# EAGLE board uzed-carrier (EAGLE 8.3.1)
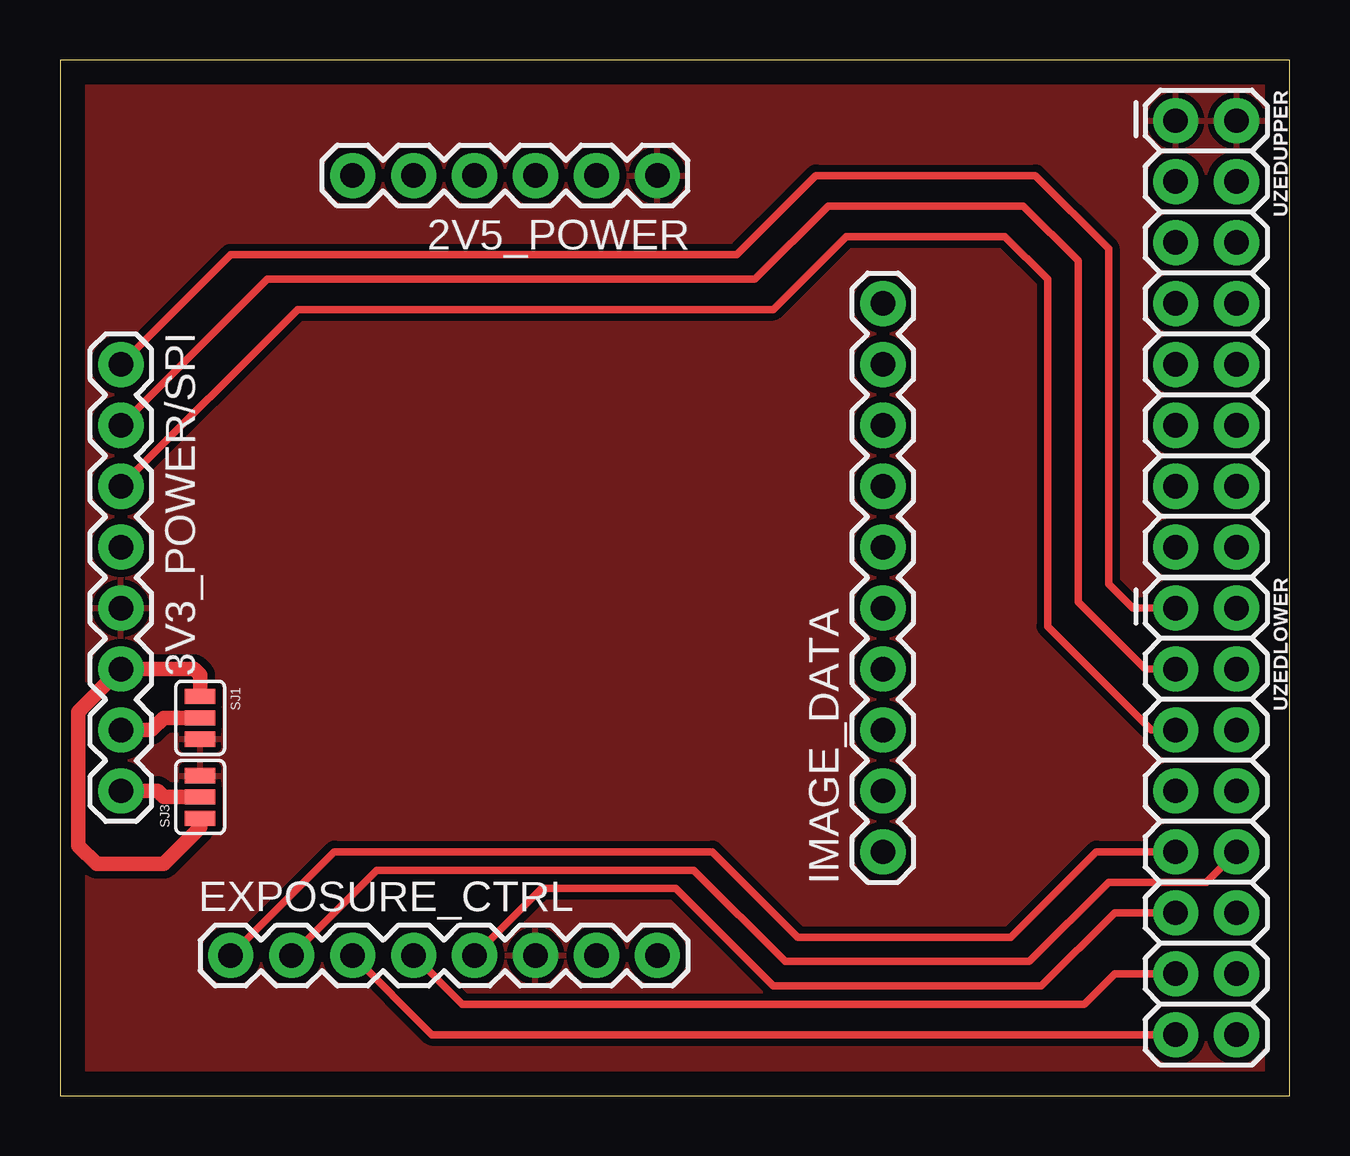
[diagram p0: board, top side]
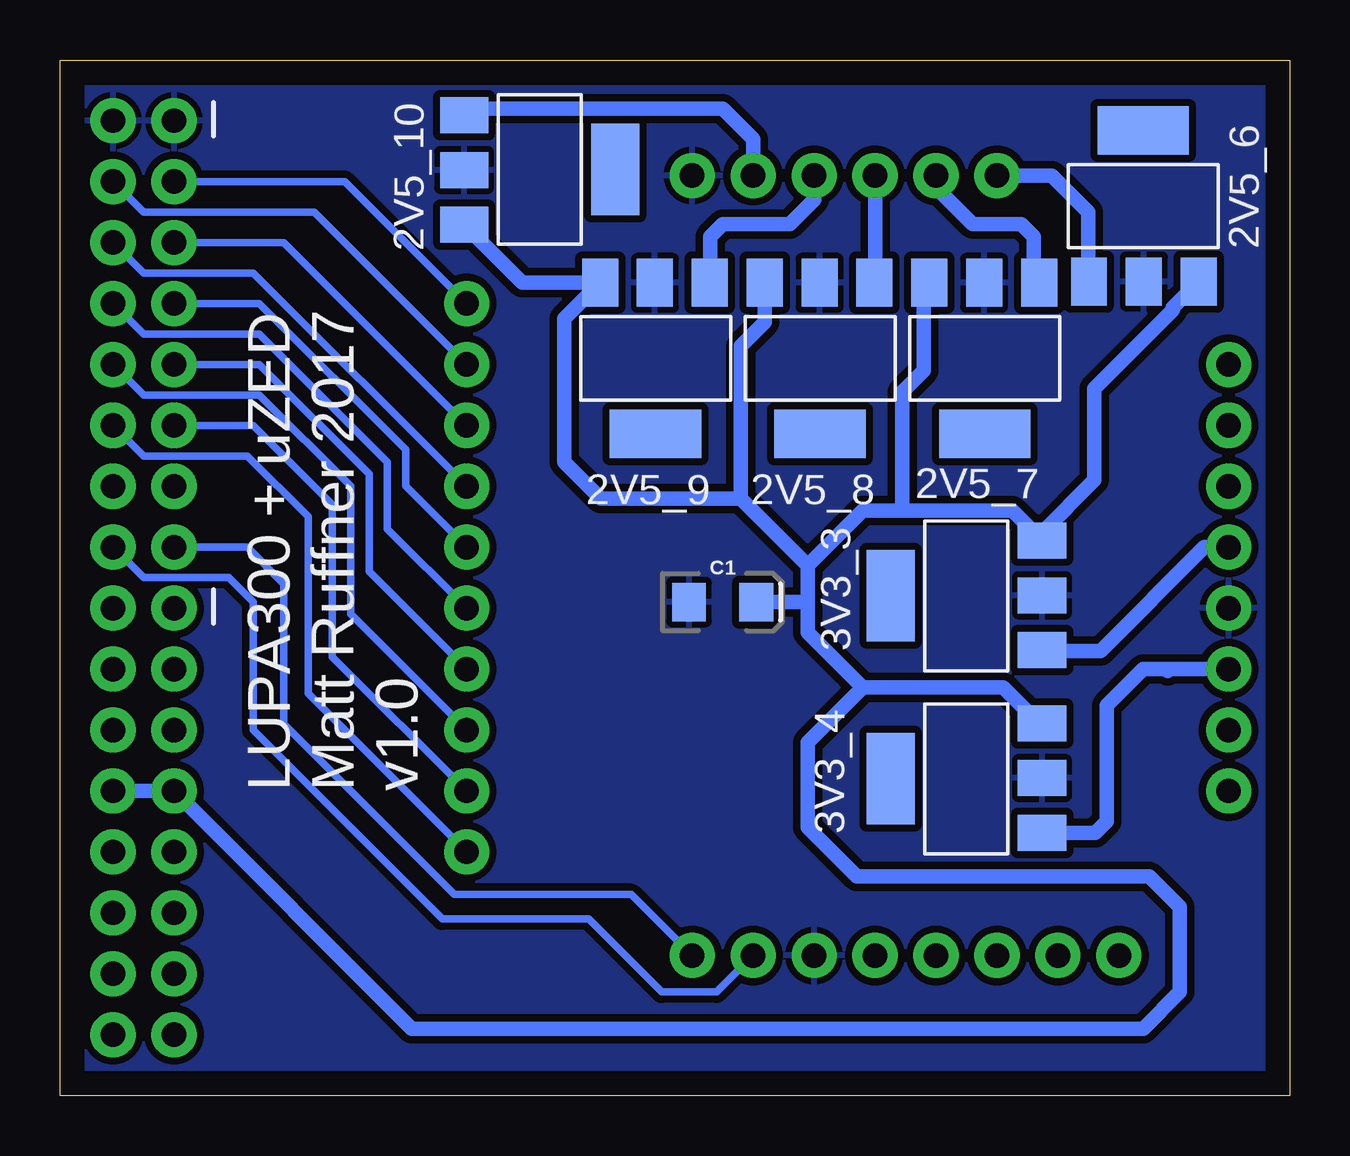
[diagram p1: board, bottom side, seen from below]

Size 51.23 x 43.17 mm. Coordinates in mm from the lower left corner, seen from the top.
Outline: 0,0 51.23,0 51.23,43.17 0,43.17 0,0
Copper layers (1*16): Top 0.035mm / dielectric 1.5mm / Bottom 0.035mm
Design rules "default": minimum track width 6mil, minimum drill 0.35mm, track to track 6mil, track to pad 6mil, pad to pad 6mil, via to via 6mil, smd to smd 6mil, copper to edge 40mil, drill to drill 6mil, minimum pad ring 10mil, minimum via ring 8mil, stop-mask expansion 4mil, vias tented up to drill 0mil, thermal gap 10mil

## Footprints (pad centres in the part's own frame; a part is rotated, then mirrored left to right if it is on the bottom)
SOT223 = smd 1.499 x 2.007: 1 -2.261,-3.15; 2 0.025,-3.15; 3 2.311,-3.15 | smd 3.81 x 2.007: 4 0,3.15
1X06 = drill 1.016 pad 1.88: 1 0,0; 2 2.54,0; 3 5.08,0; 4 7.62,0; 5 10.16,0; 6 12.7,0
1X08_ROUND = drill 1.016 pad 1.88: 1 0,0; 2 2.54,0; 3 5.08,0; 4 7.62,0; 5 10.16,0; 6 12.7,0; 7 15.24,0; 8 17.78,0
EIA3216 = smd 1.4 x 1.6: + 1.4,0; - -1.4,0
1X10 = drill 1.016 pad 1.88: 1 0,0; 2 2.54,0; 3 5.08,0; 4 7.62,0; 5 10.16,0; 6 12.7,0; 7 15.24,0; 8 17.78,0; 9 20.32,0; 10 22.86,0
SJ_3 = smd 0.635 x 1.27: 1 -0.889,0; 2 0,0; 3 0.889,0
2X8 = drill 1.016 pad 1.88: 1 0,0; 2 0,2.54; 3 2.54,0; 4 2.54,2.54; 5 5.08,0; 6 5.08,2.54; 7 7.62,0; 8 7.62,2.54; 9 10.16,0; 10 10.16,2.54; 11 12.7,0; 12 12.7,2.54; 13 15.24,0; 14 15.24,2.54; 15 17.78,0; 16 17.78,2.54

## Placement (x,y rotation side)
2V5_6  REG1118  [SOT223]  6.1,37.08 0 bottom
2V5_7  REG1118  [SOT223]  12.7,30.73 180 bottom
2V5_8  REG1118  [SOT223]  19.56,30.73 180 bottom
2V5_9  REG1118  [SOT223]  26.42,30.73 180 bottom
2V5_10  REG1118  [SOT223]  31.24,38.61 270 bottom
2V5_POWER  [1X06]  24.89,38.35 180 top
3V3_3  REG1118  [SOT223]  13.46,20.83 90 bottom
3V3_4  REG1118  [SOT223]  13.46,13.21 90 bottom
3V3_POWER/SPI  [1X08_ROUND]  2.54,30.48 270 top
C1  10uF  [EIA3216]  23.62,20.57 0 bottom
EXPOSURE_CTRL  [1X08_ROUND]  7.11,5.84 0 top
IMAGE_DATA  [1X10]  34.29,10.16 90 top
SJ1  [SJ_3]  5.84,15.75 270 top
SJ3  [SJ_3]  5.84,12.45 90 top
UZEDLOWER  [2X8]  46.48,20.32 270 top
UZEDUPPER  [2X8]  46.48,40.64 270 top

## Library data of the parts
2V5_6-2V5_10 3V3_3 3V3_4 = burr-brown; MPN: REG1118-2.85/2K5G4; OC_FARNELL: unknown; OC_NEWARK: 14M2185
2V5_POWER 3V3_POWER/SPI EXPOSURE_CTRL = SparkFun-Connectors; PROD_ID: CONN-08437
C1 = SparkFun-Capacitors; PROD_ID: CAP-00811
IMAGE_DATA = SparkFun-Connectors; PROD_ID: CONN-11563
SJ1 SJ3 = SparkFun-Retired
UZEDLOWER UZEDUPPER = SparkFun-Connectors

## Nets
CLK: EXPOSURE_CTRL.8 UZEDUPPER.15
D0: IMAGE_DATA.1 UZEDUPPER.12
D1: IMAGE_DATA.2 UZEDUPPER.11
D2: IMAGE_DATA.3 UZEDUPPER.10
D3: IMAGE_DATA.4 UZEDUPPER.9
D4: IMAGE_DATA.5 UZEDUPPER.8
D5: IMAGE_DATA.6 UZEDUPPER.7
D6: IMAGE_DATA.7 UZEDUPPER.6
D7: IMAGE_DATA.8 UZEDUPPER.5
D8: IMAGE_DATA.9 UZEDUPPER.4
D9: IMAGE_DATA.10 UZEDUPPER.3
FRAME_VALID: EXPOSURE_CTRL.2 UZEDLOWER.10
GND: 2V5_6.2 2V5_7.2 2V5_8.2 2V5_9.2 2V5_10.2 2V5_POWER.1 3V3_3.2 3V3_4.2 3V3_POWER/SPI.5 C1.- EXPOSURE_CTRL.6 SJ1.3 SJ3.3 UZEDUPPER.1 UZEDUPPER.2
INT_TIME1: EXPOSURE_CTRL.5 UZEDLOWER.11
INT_TIME2: EXPOSURE_CTRL.4 UZEDLOWER.13
INT_TIME3: EXPOSURE_CTRL.3 UZEDLOWER.15
LINE_VALID: EXPOSURE_CTRL.1 UZEDLOWER.9
RESET: EXPOSURE_CTRL.7 UZEDUPPER.16
SPI_CLK: 3V3_POWER/SPI.2 UZEDLOWER.3
SPI_DATA: 3V3_POWER/SPI.3 UZEDLOWER.5
SPI_EN: 3V3_POWER/SPI.1 UZEDLOWER.1
VADC: 2V5_8.1 2V5_POWER.4
VDDA: 2V5_7.1 2V5_POWER.5
VDDD: 2V5_9.1 2V5_POWER.3
VDDO: 2V5_10.1 2V5_POWER.2
VIN: 2V5_6.3 2V5_7.3 2V5_8.3 2V5_9.3 2V5_10.3 3V3_3.3 3V3_4.3 C1.+ UZEDLOWER.7 UZEDLOWER.8
VMEM_H: 3V3_3.1 3V3_POWER/SPI.4
VPIX: 2V5_6.1 2V5_POWER.6
VRESET_1: 3V3_4.1 3V3_POWER/SPI.6 SJ1.1 SJ3.1
VRESET_2: 3V3_POWER/SPI.7 SJ1.2
VRESET_3: 3V3_POWER/SPI.8 SJ3.2

## Tracks (layer width: path | path; a pad name or v marks a point on that pad's centre or on a via)
CLK
  Bottom 0.305: EXPOSURE_CTRL.8 27.43,8.38 34.8,8.38 41.91,15.49 41.91,21.34 43.43,22.86 UZEDUPPER.15
D0
  Bottom 0.305: IMAGE_DATA.1 40.89,16.76 40.89,24.13 43.43,26.67 47.75,26.67 UZEDUPPER.12
D1
  Bottom 0.305: IMAGE_DATA.2 39.88,18.29 39.88,24.64 43.18,27.94 UZEDUPPER.11
D2
  Bottom 0.305: IMAGE_DATA.3 39.12,20.07 39.12,25.4 42.93,29.21 47.75,29.21 UZEDUPPER.10
D3
  Bottom 0.305: IMAGE_DATA.4 38.35,21.84 38.35,25.91 42.93,30.48 UZEDUPPER.9
D4
  Bottom 0.305: IMAGE_DATA.5 37.59,23.62 37.59,26.42 42.93,31.75 47.75,31.75 UZEDUPPER.8
D5
  Bottom 0.305: IMAGE_DATA.6 36.83,25.4 36.83,26.92 42.93,33.02 UZEDUPPER.7
D6
  Bottom 0.305: IMAGE_DATA.7 43.18,34.29 47.75,34.29 UZEDUPPER.6
D7
  Bottom 0.305: IMAGE_DATA.8 41.91,35.56 UZEDUPPER.5
D8
  Bottom 0.305: IMAGE_DATA.9 40.64,36.83 47.75,36.83 UZEDUPPER.4 49.02,37.85
D9
  Bottom 0.305: IMAGE_DATA.10 39.37,38.1 UZEDUPPER.3
FRAME_VALID
  Top 0.305: EXPOSURE_CTRL.2 13.21,9.4 26.42,9.4 30.23,5.59 40.39,5.59 43.69,8.89 47.75,8.89 UZEDLOWER.10
GND
  pour Top (isolate 0.305): 0,43.18 51.31,43.18 51.31,0 0,0
  pour Bottom (isolate 0.305): 0,43.18 51.31,43.18 51.31,0 0,0
INT_TIME1
  Top 0.305: EXPOSURE_CTRL.5 20.07,8.64 25.65,8.64 29.72,4.57 40.89,4.57 43.94,7.62 UZEDLOWER.11
INT_TIME2
  Top 0.305: EXPOSURE_CTRL.4 16.76,3.81 42.67,3.81 43.94,5.08 UZEDLOWER.13
INT_TIME3
  Top 0.305: EXPOSURE_CTRL.3 15.49,2.54 UZEDLOWER.15
LINE_VALID
  Top 0.305: EXPOSURE_CTRL.1 11.43,10.16 27.18,10.16 30.73,6.6 39.62,6.6 43.18,10.16 UZEDLOWER.9
RESET
  Bottom 0.305: EXPOSURE_CTRL.7 23.88,4.32 26.16,4.32 29.21,7.37 35.31,7.37 43.18,15.24 43.18,20.57 44.2,21.59 47.75,21.59 UZEDUPPER.16
SPI_CLK
  Top 0.305: 3V3_POWER/SPI.2 8.64,34.04 28.96,34.04 32,37.08 40.13,37.08 42.42,34.8 42.42,20.57 45.21,17.78 UZEDLOWER.3
SPI_DATA
  Top 0.305: 3V3_POWER/SPI.3 9.91,32.77 29.72,32.77 32.77,35.81 39.37,35.81 41.15,34.04 41.15,19.56 45.47,15.24 UZEDLOWER.5
SPI_EN
  Top 0.305: 3V3_POWER/SPI.1 7.11,35.05 28.19,35.05 31.5,38.35 40.64,38.35 43.69,35.31 43.69,21.34 44.7,20.32 UZEDLOWER.1
VADC
  Bottom 0.61: 2V5_8.1 17.27,33.91 2V5_POWER.4
VDDA
  Bottom 0.61: 2V5_7.1 10.67,34.11 10.67,35.81 11.18,36.32 13.21,36.32 14.73,37.85 2V5_POWER.5
VDDD
  Bottom 0.61: 2V5_9.1 24.13,33.91 24.13,35.81 23.62,36.32 20.83,36.32 19.81,37.34 2V5_POWER.3
VDDO
  Bottom 0.61: 2V5_10.1 34.11,41.15 23.62,41.15 22.35,39.88 2V5_POWER.2
VIN
  Bottom 0.61: UZEDLOWER.8 UZEDLOWER.7 36.58,2.79 6.1,2.79 4.57,4.32 4.57,7.87 5.84,9.14 18.03,9.14 20.07,11.18 20.07,14.73 17.78,17.02 | 17.78,17.02 11.94,17.02 10.44,15.52 3V3_4.3 | 16.14,24.38 11.56,24.38 3V3_3.3 10.31,23.47 8.13,25.65 8.13,29.48 4.86,32.74 4.86,32.85 2V5_6.3 | 16.14,24.38 17.78,24.38 20.07,22.1 | 20.07,20.58 20.07,22.1 | 20.07,20.58 20.07,19.3 17.78,17.02 | 22.86,24.89 20.07,22.1 | 2V5_8.3 21.87,32.23 22.86,31.24 22.86,24.89 | 22.86,24.89 28.7,24.89 30.23,26.42 30.23,32.38 2V5_9.3 31.98,33.88 2V5_10.3 | 2V5_7.3 15.24,33.66 15.24,30.23 16.14,29.32 16.14,24.38 | C1.+ 20.07,20.57 20.07,20.58
VMEM_H
  Bottom 0.61: 3V3_3.1 10.29,18.54 7.87,18.54 3.56,22.86 3V3_POWER/SPI.4
VPIX
  Bottom 0.61: 2V5_6.1 8.38,33.96 8.38,36.83 9.91,38.35 2V5_POWER.6
VRESET_1
  Top 0.61: SJ1.1 5.84,17.53 5.59,17.78 3V3_POWER/SPI.6 0.76,16 0.76,10.41 1.52,9.65 4.32,9.65 5.84,11.18 SJ3.1
  Bottom 0.61: 3V3_4.1 8.1,10.95 7.62,11.43 7.62,16.26 6.1,17.78 5.16,17.78 | 3V3_POWER/SPI.6 5.16,17.78 | 5.08,17.7 5.16,17.78
VRESET_2
  Top 0.61: 3V3_POWER/SPI.7 3.81,15.24 4.32,15.75 SJ1.2
VRESET_3
  Top 0.61: SJ3.2 4.32,12.45 4.06,12.7 3V3_POWER/SPI.8

## Text on the board
bNames: LUPA300 + uZED / Matt Ruffner 2017 / v1.0